# Altium PCB ERN_MainPower.PcbDoc
Units mil, origin at the board's own origin, x right, y up, seen from the top; angles counter-clockwise.
Board outline 6000 x 4000 mil, 2 copper layers (Top Layer, Bottom Layer); 65 components, 38 nets, 173 pads, 0 vias.
Unrouted connection lines stored in the file: 125.
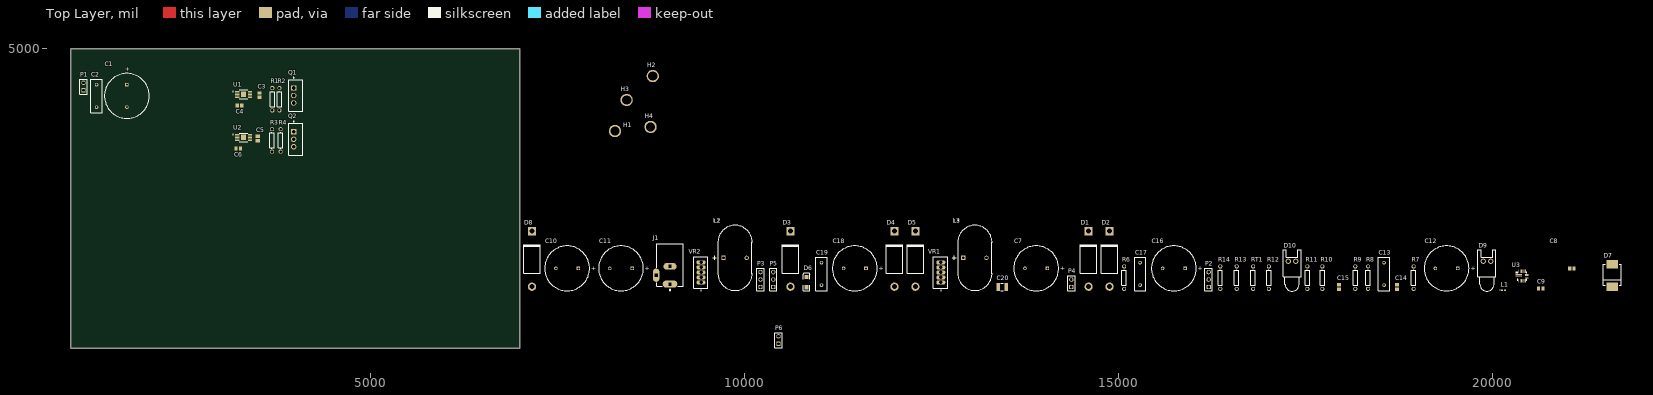
[diagram p0: Top Layer view]
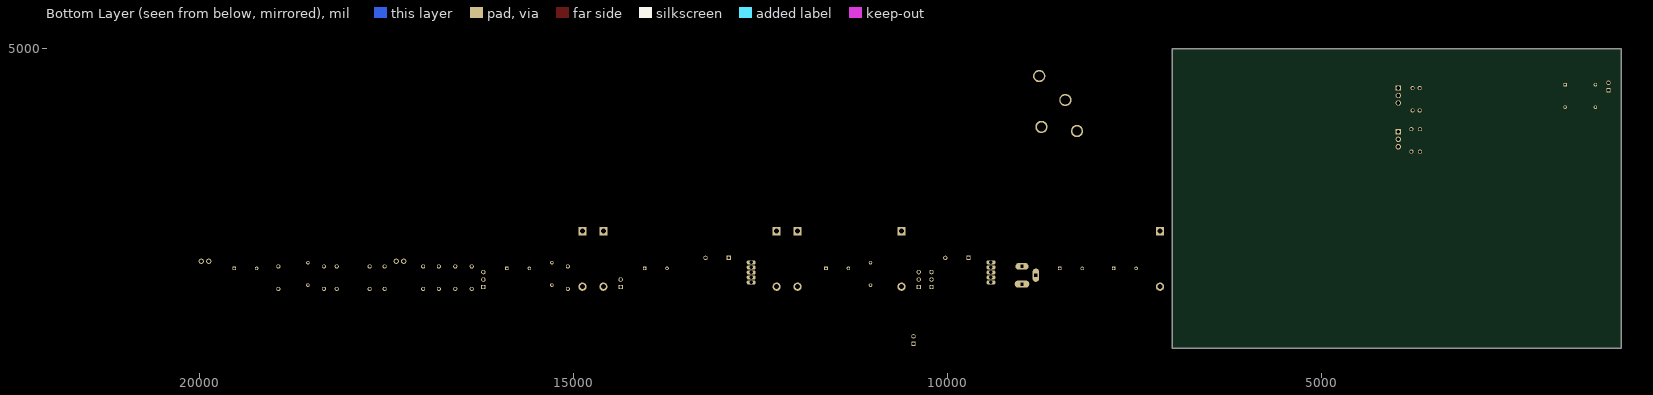
[diagram p1: Bottom Layer view, seen from below]

## Layer stack, top to bottom
Top Solder: solder mask 0.4, Solder Resist, Dk 3.5
Top Layer: signal copper 1.4
Dielectric 1: dielectric 12.6, FR-4, Dk 4.8
Bottom Layer: signal copper 1.4
Bottom Solder: solder mask 0.4, Solder Resist, Dk 3.5

## Board outline
1000,1000 7000,1000 7000,5000 1000,5000

## Design rules (kind name [scope] priority, off if disabled: settings)
Clearance [All] p1: gap=10 ignorepadtopadclearanceinfootprint=TRUE
PolygonConnect [All] p1: connectstyle=Relief reliefconductorwidth=10 reliefentries=4 polygonreliefangle="90 Angle" airgapwidth=10
RoutingVias [All] p1: holewidth=28 width=50 viastyle="Through Hole" minholewidth=28 minwidth=50 maxholewidth=28 maxwidth=50
SolderMaskExpansion [All] p1: expansion=4 istentingtop=FALSE
SupplyNets "Schematic Supply Nets_1" [InNet('VBATT')] p1: voltage=0.000
SupplyNets "Schematic Supply Nets" [InNet('GND')] p2: voltage=0.000
Width [All] p1: maxlimit=10 minlimit=10 preferedwidth=10
30 further rules are at their usual default settings.

## Classes and differential pairs
component class ERN_MainPower_2: C7 C8 C9 C10 C11 C12 C13 C14 C15 C16 C17 C18 C19 C20 D1 D2 D3 D4 D5 D6 D7 D8 D9 D10 J1 L1 L2 L3 P2 P3 P4 P5 R6 R7 R8 R9 R10 R11 R12 R13 R14 RT1 U3 VR1 VR2
component class ERN_MainPower: C1 C2 C3 C4 C5 C6 H1 H2 H3 H4 P1 P6 Q1 Q2 R1 R2 R3 R4 U1 U2

## Components (designator, comment, footprint, x,y, rotation, side; value= is the part's Value field where it differs from the comment)
C1 "Cap Pol1" RB7.6-15 1750,4370 r90 top value=100uF
C2 "Cap" RAD-0.3 1345,4370 r90 top value=0.1uF
C3 "Cap" C0805 3525,4380 r90 top value=1uF
C4 "Cap" C0805 3255,4240 r180 top value=0.1uF
C5 "Cap" C0805 3500,3800 r90 top value=1uF
C6 "Cap" C0805 3240,3665 r180 top value=0.1uF
C7 "Cap Pol1" RB7.6-15 13905,2065 r0 top value=10uF
C8 "Cap" C0805 21065,2065 r0 top value=10nF
C9 "Cap" C0805 20650,1795 r0 top value=10nF
C10 "Cap Pol1" RB7.6-15 7635,2065 r0 top value=100uF
C11 "Cap Pol1" RB7.6-15 8355,2065 r0 top value=1000uF
C12 "Cap Pol1" RB7.6-15 19390,2065 r0 top value=47uF
C13 "Cap" RAD-0.3 18555,1990 r90 top value=100nF
C14 "Cap" C0805 18730,1815 r90 top value=10nF
C15 "Cap" C0805 17950,1815 r90 top value=10nF
C16 "Cap Pol1" RB7.6-15 15745,2065 r0 top value=10uF
C17 "Cap" RAD-0.3 15295,1990 r90 top value=0.1uF
C18 "Cap Pol1" RB7.6-15 11480,2065 r0 top value=1000uF
C19 "Cap" RAD-0.3 11035,1990 r90 top value=0.1uF
C20 "Cap" C1210 13450,1815 r0 top value=94nF
D1 "Diode 1N5406" DO-201AD 14605,2190 r90 top
D2 "Diode 1N5406" DO-201AD 14885,2190 r90 top
D3 "Diode 1N5400" DO-201AD 10620,2190 r90 top
D4 "Diode 1N5406" DO-201AD 12010,2190 r90 top
D5 "Diode 1N5406" DO-201AD 12290,2190 r90 top
D6 "LED2" 3.2X1.6X1.1 10835,1880 r90 top
D7 "Diode" DIODE_SMC 21605,1970 r90 top
D8 "Diode 1N5400" DO-201AD 7165,2190 r90 top
D9 "LED2" LED-0 19930,2160 r0 top
D10 "LED2" LED-0 17325,2160 r0 top
H1 "Hole 125mil" "Hole 125mil" 8275,3900 r0 top
H2 "Hole 125mil" "Hole 125mil" 8780,4635 r0 top
H3 "Hole 125mil" "Hole 125mil" 8430,4315 r0 top
H4 "Hole 125mil" "Hole 125mil" 8750,3955 r0 top
J1 "PJ-002BH" CUI_PJ-002BH 9010,1855 r90 top
L1 "Inductor" 0402-A 20150,1775 r0 top value=10uH
L2 "2111-V-RC" IND_21XX_27A_V 9725,2205 r0 top
L3 "2111-V-RC" IND_21XX_27A_V 12930,2205 r0 top
P1 "Header 2" HDR1X2 1170,4445 r90 top
P2 "Header 3" HDR1X3 16210,1815 r90 top
P3 "Header 3" HDR1X3 10220,1815 r90 top
P4 "Header 2" HDR1X2 14375,1815 r90 top
P5 "Header 3" HDR1X3 10390,1815 r90 top
P6 "Header 2" HDR1X2 10460,1055 r90 top
Q1 "IRFB7545" IFX-PG-TO220-3-904 3980,4375 r0 top
Q2 "IRFB7545" IFX-PG-TO220-3-904 3980,3790 r0 top
R1 "Res1" AXIAL-0.3 3695,4325 r270 top value=100k
R2 "Res1" AXIAL-0.3 3790,4325 r270 top value=10
R3 "Res1" AXIAL-0.3 3690,3775 r270 top value=100k
R4 "Res1" AXIAL-0.3 3805,3775 r270 top value=10
R6 "Res1" AXIAL-0.3 15080,1940 r90 top value=1k
R7 "Res1" AXIAL-0.3 18950,1940 r90 top value=10K
R8 "Res1" AXIAL-0.3 18340,1940 r90 top value=10K
R9 "Res1" AXIAL-0.3 18170,1940 r90 top value=10K
R10 "Res1" AXIAL-0.3 17730,1940 r90 top value=10K
R11 "Res1" AXIAL-0.3 17530,1940 r90 top value=10K
R12 "Res1" AXIAL-0.3 17015,1940 r90 top value=10K
R13 "Res1" AXIAL-0.3 16585,1940 r90 top value=10K
R14 "Res1" AXIAL-0.3 16365,1940 r90 top value=2k
RT1 "Res Thermal" AXIAL-0.3 16805,1940 r90 top
U1 "LTC7001MPMSE#PBF" SOP50P490X110-11N 3310,4390 r0 top
U2 "LTC7001MPMSE#PBF" SOP50P490X110-11N 3309.96,3814.68 r0 top
U3 "MP2659" MP2659_QFN19 20400,1905 r0 top
VR1 "LM2576T-5.0/NOPB" TO170P1067X483X1651-5 12630,2010 r90 top
VR2 "LM2576T-5.0/NOPB" TO170P1067X483X1651-5 9425,2010 r90 top

## Footprints (in the part's own frame and the unit in brackets; to place one, negate y for a bottom-side part, rotate by r counter-clockwise, add the part's x,y. Pads: shape width x height; smd on the part's side, far side on the other; paste and mask are expansions set on the pad)
3.2X1.6X1.1 [mm] "SMT LED; 2 Flat Leads"
  rect 1.5x1.5 smd: 1(-1.75,0) 2(1.75,0)
  silkscreen extent -2.9,-1.15 3.2,1.15
0402-A [mm] "Chip Inductor, Body 1.0x0.5mm, IPC High Density"
  rect 0.6x0.5 smd: 1(-0.5,0) 2(0.5,0)
  silkscreen extent -1.1,-0.15 -1.1,0.15, body extent -0.55,-0.3 0.55,0.3, height 0.55
AXIAL-0.3 [mm] "Axial Device, Thru-Hole; 2 Leads; 0.3 in Pin Spacing"
  round 1.4 hole 0.85: 1(-3.81,0) 2(3.81,0)
  silkscreen extent -2.77,-0.76 2.77,0.76
C0805 [mm] "Chip Capacitor, Body 2.0x1.3mm, IPC High Density"
  rect 1.1x1.4 smd: 1(-0.75,0) 2(0.75,0)
  body extent -1.1,-0.72 1.1,0.72, height 1.4
C1210 [mm] "Chip Capacitor, Body 3.2x2.5mm, IPC High Density"
  rect 1.1x2.6 smd: 1(-1.35,0) 2(1.35,0)
  silkscreen extent -0.4,-1.2 0.4,1.2, body extent -1.7,-1.35 1.7,1.35, height 1.3
CUI_PJ-002BH [mm]
  oval 2.5x5 hole 1 square: 1(0,0)
  oval 2.25x4.5 hole 1 square: 2(6,0)
  oval 4.5x2.25 hole 1 square: 3(3,4.7)
  silkscreen extent -2.2,-4.5 13.7,4.5, body extent -0.64,-4.7 13.76,4.7, height 4.5
DIODE_SMC [mil] "Diode; 2 Leads"
  rect 110x150 smd: 1(-150,0) 2(150,0)
  silkscreen extent -130,-120 150,120
DO-201AD [mm] "Diode, Axial; Body 9.5 x 5.6 mm (LxDia. max), Lead Dia. 1.32 mm (max)"
  round 2.8 hole 1.7: 1(-9.42,0)
  rect 2.8x2.8 hole 1.7: 2(9.42,0)
  silkscreen extent -4.8,-2.8 4.9,2.8
HDR1X2 [mm] "Connector; Header; 2 Position"
  rect 1.5x1.5 hole 0.9: 1(0,0)
  round 1.5 hole 0.9: 2(2.54,0)
  silkscreen extent -1.27,-1.27 3.81,1.27
HDR1X3 [mm] "Connector; Header; 3 Position"
  rect 1.5x1.5 hole 0.9: 1(0,0)
  round 1.5 hole 0.9: 2(2.54,0) 3(5.08,0)
  silkscreen extent -1.27,-1.27 6.35,1.27
"Hole 125mil" [mil]
  round 165 hole 125: 1(0,0)
IFX-PG-TO220-3-904 [mm] "TO,flange mount,2.54mm pitch;3 pin,4.45mm L X 10.66mm W X 19.15mm H body"
  rect 1.84x1.84 hole 1.24 paste-2539.97 mask+0: 1(0,2.54)
  round 1.84 hole 1.24 paste-2539.97 mask+0: 2(0,0) 3(0,-2.54)
  silkscreen extent -1.6,-5.4 3,6.17, body extent -1.53,-5.33 2.93,5.33, height 19.1
IND_21XX_27A_V [mil]
  rect 57x57 hole 37 paste-99999 mask+0: 1(0,0)
  round 57 hole 37 paste-99999 mask+0: 2(310,0)
  silkscreen extent -145,-435 385,435
LED-0 [mil] "LED; 2 Leads"
  round 70 hole 50: 1(50,0) 2(-50,0)
  silkscreen extent -120,-400 120,150
MP2659_QFN19 [mm] "QFN-19 Package for MP2659"
  rect 2.1x0.25 smd mask+0.05: 1(-1.15,1.95) 2(-1.15,1.4) 3(-1.15,0.85)
  rect 0.25x1.2 smd mask+0.05: 4(-1.15,-0.2) 9(1.15,-0.2) 14(1.15,3) 19(-1.15,3)
  rect 0.2x1.2 smd mask+0.05: 5(-0.6,-0.2) 6(-0.2,-0.2) 7(0.2,-0.2) 8(0.6,-0.2) 15(0.6,3) 16(0.2,3) 17(-0.2,3) 18(-0.6,3)
  rect 1.2x0.2 smd mask+0.05: 10(1.6,0.8) 11(1.6,1.2) 12(1.6,1.6) 13(1.6,2)
  silkscreen extent -2.16,-0.1 1.5,2.9
RAD-0.3 [mm] "Radial Cap, Thru-Hole; 2 Leads; 0.3 in Pin Spacing"
  round 1.2 hole 0.7: 1(-3.81,0) 2(3.81,0)
  silkscreen extent -5.71,-1.91 5.71,1.91
RB7.6-15 [mm] "Polarized Capacitor (Radial); 2 Leads"
  rect 1.2x1.2 hole 0.7: 1(3.81,0)
  round 1.2 hole 0.7: 2(-3.81,0)
  silkscreen extent -7.62,-7.62 7.62,7.62
SOP50P490X110-11N [mm]
  rrect25% 1.45x0.28 smd paste+0 mask+0.102: 1(-2.16,1) 2(-2.16,0.5) 3(-2.16,0) 4(-2.16,-0.5) 5(-2.16,-1) 6(2.16,-1) 7(2.16,-0.5) 8(2.16,0) 9(2.16,0.5) 10(2.16,1)
  rect 1.68x1.88 smd paste-2 mask+0.102: EXP(0,0)
  silkscreen extent -3.65,-1.5 1.5,1.5, body extent -2.45,-1.5 2.45,1.5, height 1.1
TO170P1067X483X1651-5 [mm]
  oval 1.45x3.1 hole 1.2 mask+0.07: 1(-3.4,0) 2(-1.7,0) 3(0,0) 4(1.7,0) 5(3.4,0)
  silkscreen extent -6.27,-2.29 5.34,2.54, body extent -5.08,0 5.08,4.45, height 16.84

## Part data
C1 C7 C10 C11 C12 C16 C18: "Polarized Capacitor (Radial)", LatestRevisionDate=17-Jul-2002, LatestRevisionNote="Re-released for DXP Platform.", PackageDescription="Polarized Capacitor (Radial); 2 Leads", PackageReference=RB7.6-15, Published=8-Jun-2000, Publisher="Altium Limited"
C2 C3 C4 C5 C6 C8 C9 C13 C14 C15 C17 C19 C20: "Capacitor", LatestRevisionDate=17-Jul-2002, LatestRevisionNote="Re-released for DXP Platform.", PackageDescription="Radial Cap, Thru-Hole; 2 Leads; 0.3 in Pin Spacing", PackageReference=RAD-0.3, Published=8-Jun-2000, Publisher="Altium Limited"
D1 D2 D3 D4 D5 D8: "3 Amp General Purpose Rectifier", ComponentLink1Description="Manufacturer Link", ComponentLink1URL=http://www.fairchildsemi.com/, ComponentLink2Description=Datasheet, ComponentLink2URL=http://www.fairchildsemi.com/ds/1N%2F1N5400.pdf, DatasheetVersion=1998, LatestRevisionDate=17-Jul-2002, LatestRevisionNote="Re-released for DXP Platform.", PackageDescription="Diode, Axial; Body 9.5 x 5.6 mm (LxDia. max), Lead Dia. 1.32 mm (max)", PackageReference=DO-201AD, PackageVersion=Aug-1999, Published=8-Jun-2000, Publisher="Altium Limited"
D6 D9 D10: "Typical RED, GREEN, YELLOW, AMBER GaAs LED", LatestRevisionDate=17-Jul-2002, LatestRevisionNote="Re-released for DXP Platform.", PackageDescription="SM LED; 2 Flat Leads", PackageReference=3.2X1.6X1.1, PackageVersion=Feb-2002, Published=8-Jun-2000, Publisher="Altium Limited"
D7: "Default Diode", Code_JEDEC=DO-214-AB, LatestRevisionDate=17-Jul-2002, LatestRevisionNote="Re-released for DXP Platform.", PackageDescription="DO-214-AB/SMC; 2 C-Bend Leads; Body 7.9 x 5.9 mm, inc. leads (LxW)", PackageReference=SMC, PackageVersion=Sep-1996, Published=8-Jun-2000, Publisher="Altium Limited"
J1: "2.5 x 6.5 mm, 5.0 A, Horizontal, Through Hole, Dc Power Jack Connector", Package=None, Check_prices=https://www.snapeda.com/parts/PJ-002BH/Same+Sky/view-part/?ref=eda, MF="Same Sky", MP=PJ-002BH, SnapEDA_Link=https://www.snapeda.com/parts/PJ-002BH/Same+Sky/view-part/?ref=snap
L2 L3: "Inductor 68uH", Manufacturer_Name="Bourns Electronics", Copyright="Copyright (C) 2026 Ultra Librarian. All rights reserved.", Manufacturer_Part_Number=2111-V-RC
P1 P4 P6: "Header, 2-Pin", LatestRevisionDate=17-Jul-2002, LatestRevisionNote="Re-released for DXP Platform.", Publisher="Altium Limited"
P2 P3 P5: "Header, 3-Pin", LatestRevisionDate=17-Jul-2002, LatestRevisionNote="Re-released for DXP Platform.", Publisher="Altium Limited"
Q1 Q2: "N-Channel 60V 95A; Insulated-Gate Field-Effect Transistor (IGFET), N-Channel, Enhancement, Body Diode, Pin 1 Gate, 2 Drain, 3 Source, 3 Pins", Manufacturer="Infineon Technologies", Manufacturer Order Number=IRFB7545, PackageReference=PG-TO220-3-904
R1 R2 R3 R4 R6 R7 R8 R9 R10 R11 R12 R13 R14: "Resistor", LatestRevisionDate=17-Jul-2002, LatestRevisionNote="Re-released for DXP Platform.", PackageDescription="Axial Device, Thru-Hole; 2 Leads; 0.3 in Pin Spacing", PackageReference=AXIAL-0.3, Published=8-Jun-2000, Publisher="Altium Limited"
RT1: "Thermistor", Code_IPC=RESC2012, LatestRevisionDate=29-May-2009, LatestRevisionNote="IPC-7351 Footprint Added.", PackageDescription="Chip Resistor 0805 Case Size", PackageReference=6-0805, PackageVersion=Mar-2003, Published=24-Mar-1999, Publisher="Altium Limited"
U1 U2: "Fast 150V High Side NMOS Static Switch Driver", Package="MSOP -10 Analog Devices", Check_prices=https://www.snapeda.com/parts/LTC7001MPMSE%23PBF/Analog+Devices/view-part/?ref=eda, MF="Analog Devices", MP=LTC7001MPMSE#PBF, SnapEDA_Link=https://www.snapeda.com/parts/LTC7001MPMSE%23PBF/Analog+Devices/view-part/?ref=snap
U3: "3S-6S Standalone Switching Charger"
VR1 VR2: "SIMPLE SWITCHERÂ® 40V, 3A Low Component Count Step-Down Regulator", Package="TO-220-5 Texas Instruments", Check_prices=https://www.snapeda.com/parts/LM2576T-5.0/NOPB/Texas+Instruments/view-part/?ref=eda, MF="Texas Instruments", MP=LM2576T-5.0/NOPB, SnapEDA_Link=https://www.snapeda.com/parts/LM2576T-5.0/NOPB/Texas+Instruments/view-part/?ref=snap
L1: Code_IEC=1005, Code_JEITA=0402, LatestRevisionDate=29-May-2009, LatestRevisionNote="IPC-7351 Footprint Added.", PackageDescription="Chip Inductor", PackageReference=0402-A, Published=8-Jun-2000, Publisher="Altium Limited"

## Nets (pads, with @x,y where several pads share a name; then routed paths per layer and width w, separated by ;. In a path a pad name is that pad's centre, name@x,y a point inside that pad or via, vN(x,y) a via of type N, cw(c..) or ccw(c..) an arc to the next point about the centre after c; other vN are vias at no path point)
C\H\G\_\O\N\: P6.2 U1.4 U2.4
CHG_5V: P3.2 P6.1
CHG_24V: C12.1 C13.2 D7.1 P5.2 R7.2 R9.1 U3.1
GND: C1.2 C2.1 C4.2 C6.2 C7.2 C8.1 C10.2 C11.2 C12.2 C13.1 C14.2 C15.2 C16.2 C17.2 C18.2 C19.2 D3.1 D4.1 D5.1 D6.2 D8.1 J1.2 P1.1 P2.3 R8.2 R11.2 R12.1 R13.2 RT1.2 U1.2 U1.3 U1.5 U1.EXP U2.2 U2.3 U2.5 U2.EXP U3.5 U3.10 U3.12 VR1.3 VR1.5 VR2.3 VR2.5
MP2659_VCC: C15.1 R10.2 R14.2 U3.16
NetC3_1: C3.1 Q1.3 U1.8
NetC3_2: C3.2 U1.9
NetC4_1: C4.1 R2.2
NetC5_1: C5.1 Q2.3 U2.8
NetC5_2: C5.2 U2.9
NetC6_1: C6.1 R4.2
NetC7_1: C7.1 C19.1 D1.2 D2.2 P2.1 R6.2 VR1.1
NetC8_2: C8.2 D7.2 U3.2 U3.19
NetC9_1: C9.1 L1.1 U3.3
NetC9_2: C9.2 U3.4
NetC20_1: C20.1 P4.2
NetC20_2: C20.2 D1.1 D4.2
NetD2_1: D2.1 D5.2 P4.1
NetD3_2: D3.2 L3.2 VR1.2
NetD6_1: D6.1 R6.1
NetD8_2: D8.2 L2.2 VR2.2
NetD9_1: D9.1 R7.1
NetD9_2: D9.2 U3.9
NetD10_1: D10.1 R14.1
NetD10_2: D10.2 U3.8
NetQ1_1: Q1.1 R1.1 R2.1 U1.6
NetQ2_1: Q2.1 R3.1 R4.1 U2.6
NetR1_2: R1.2 U1.7
NetR3_2: R3.2 U2.7
NetR8_1: R8.1 U3.15
NetR9_2: R9.2 R11.1 U3.18
NetR10_1: R10.1 R12.2 RT1.1 U3.13
NetR13_1: R13.1 U3.17
VBATT: C1.1 C2.2 C14.1 L1.2 P1.2 Q1.2 Q2.2 U1.1 U2.1 U3.14
Wired5V: C11.1 L2.1 P3.3 VR2.4
Wired24V: C10.1 J1.1 P5.3 VR2.1
Wireless5V: C18.1 L3.1 P3.1 VR1.4
Wireless24V: C16.1 C17.1 P2.2 P5.1
pads on no net: H1.1 H2.1 H3.1 H4.1 J1.3 U1.10 U2.10 U3.6 U3.7 U3.11

## Text inside footprints (layer, text, board x,y; h text height)
C1: Top Overlay "+" at 1779.01,4690.15 h59.06 r90
C7: Top Overlay "+" at 14225.15,2035.99 h59.06
C10: Top Overlay "+" at 7955.15,2035.99 h59.06
C11: Top Overlay "+" at 8675.15,2035.99 h59.06
C12: Top Overlay "+" at 19710.15,2035.99 h59.06
C16: Top Overlay "+" at 16065.15,2035.99 h59.06
C18: Top Overlay "+" at 11800.15,2035.99 h59.06